# Altium PCB MADI_nRF52840_PCB_L4.PcbDoc (part 2 of 3)
Units mm, origin at the board's own origin, x right, y up, seen from the top; angles counter-clockwise.
Board outline 30 x 21.59 mm, 4 copper layers (L1, L2 (GND), L3 (GND), L4), stack 1.525 mm thick; 59 components, 58 nets, 307 pads, 195 vias.
Unrouted connection lines stored in the file: 114.
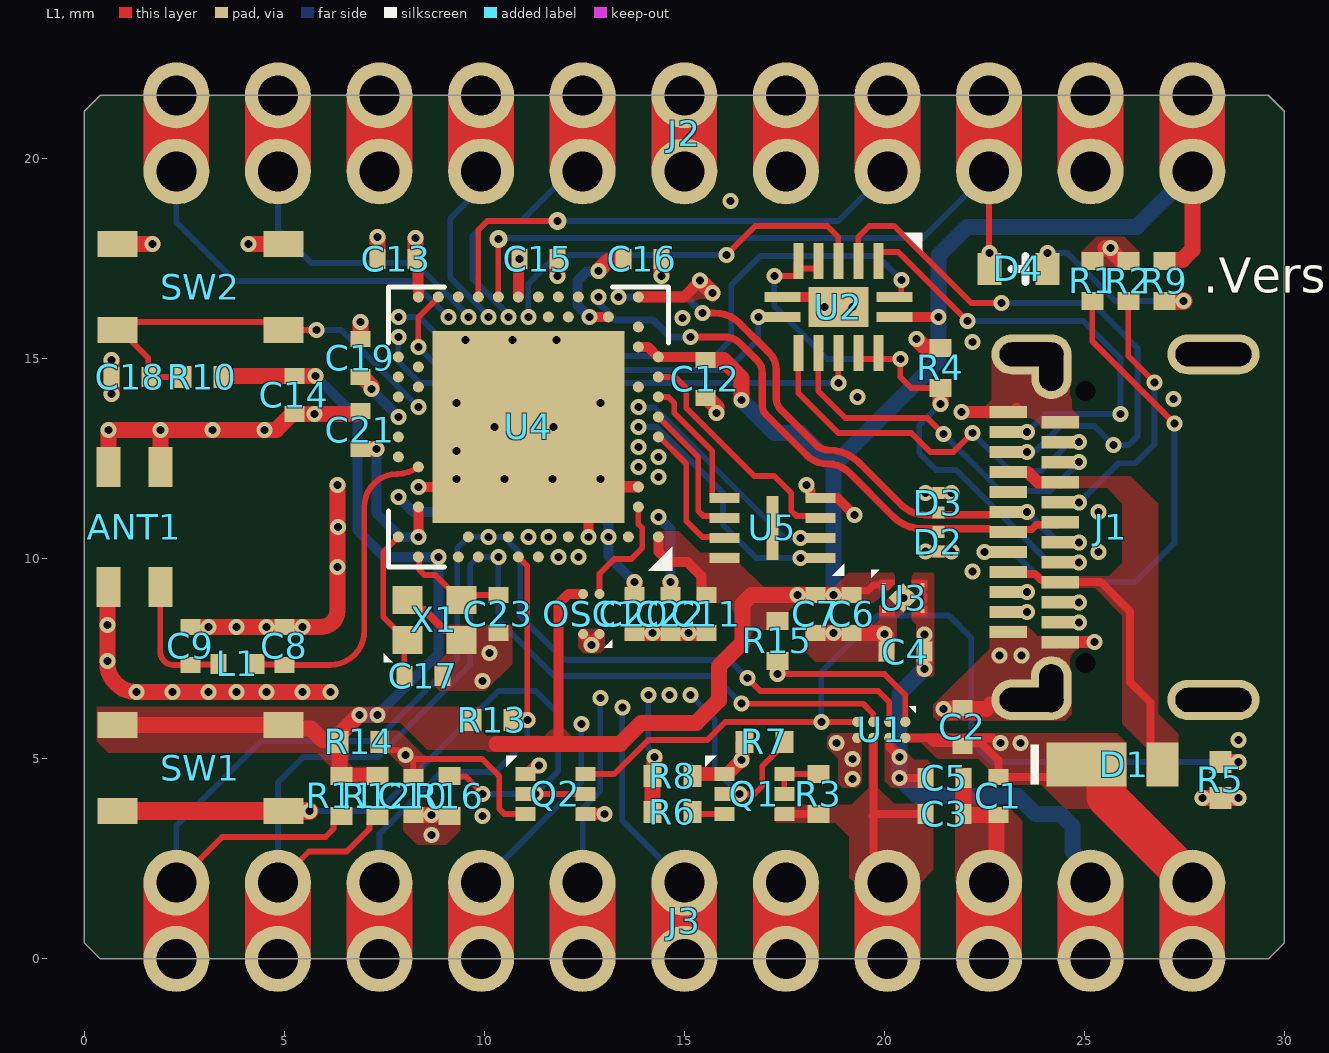
[diagram p0: L1 view]

## Part data (continued)
R6: library part RC0402FR-07360KL, "RES SMD 360K OHM 1% 1/16W 0402", Case Code (Imperial)=0402, Case Code (Metric)=1005, Manufacturer=Yageo, Max Operating Temperature=155°C, Max Power Dissipation=63mW, Min Operating Temperature=-55°C, Package Quantity=1, Power Rating=62.5mW, Resistance Tolerance=1%, Resistor Type="Thick Film", Supplier Part Number 1=311-360KLRCT-ND, Temperature Coefficient=100ppm/°C, Voltage Rating=50V, Case/Package=0402, Category="Chip SMD Resistors", ComponentLink1Description=https://datasheet.ciiva.com/2453/pyu-r-int-thick-7-2453620.pdf?src-supplier=Digi-Key, ComponentLink1URL=https://datasheet.ciiva.com/2453/pyu-r-int-thick-7-2453620.pdf?src-supplier=Digi-Key, ComponentLink2Description=https://datasheet.ciiva.com/2453/pyu-r-int-thick-7-2453621.pdf?src-supplier=Digi-Key, ComponentLink2URL=https://datasheet.ciiva.com/2453/pyu-r-int-thick-7-2453621.pdf?src-supplier=Digi-Key, ComponentLink3Description=https://datasheet.ciiva.com/2453/pyu-r-int-thick-7-2453619.pdf?src-supplier=Digi-Key, ComponentLink3URL=https://datasheet.ciiva.com/2453/pyu-r-int-thick-7-2453619.pdf?src-supplier=Digi-Key, ComponentLink4Description=https://datasheet.ciiva.com/12561/pyu-rc0402-51-rohs-l-6-r-8721-12561150.pdf?src-supplier=Mouser, ComponentLink4URL=https://datasheet.ciiva.com/12561/pyu-rc0402-51-rohs-l-6-r-8721-12561150.pdf?src-supplier=Mouser, ComponentLink5Description=https://datasheet.ciiva.com/8886/pyu-rc0402-51-rohs-l-6-8886029.pdf?src-supplier=Avnet, ComponentLink5URL=https://datasheet.ciiva.com/8886/pyu-rc0402-51-rohs-l-6-8886029.pdf?src-supplier=Avnet, ComponentLink6Description=https://datasheet.ciiva.com/16742/pyu-rc0402-51-rohs-l-6-r-16742217.pdf?src-supplier=Future+Electronics, ComponentLink6URL=https://datasheet.ciiva.com/16742/pyu-rc0402-51-rohs-l-6-r-16742217.pdf?src-supplier=Future+Electronics, Construction=Rectangular, Contact Plating=Tin,Matte, Depth=0.5mm, Features="Moisture Resistant", Height=0.016inch, Lead Free="Lead Free", Length=1mm, Manufacturer Part Number=RC0402FR-07360KL, Military Standard=Not, Number of Terminations=2, Packaging="Tape and Reel", Pricing 1="1=0.10000, 10=0.01400, 100=0.00580, 1000=0.00262, 2500=0.00228, 5000=0.00188 (USD)", RoHS=Yes, RoHS Compliant=Yes, Series=RC, Stock 1=662020, Supplier 1=Digi-Key, Termination=SMD/SMT, Tolerance=1%, Voltage Rating (DC)=50V, Width=0.02inch
R8: library part RC0402FR-0756KL, "RES SMD 56K OHM 1% 1/16W 0402", Case Code (Imperial)=0402, Case Code (Metric)=1005, Manufacturer=Yageo, Max Operating Temperature=155°C, Max Power Dissipation=63mW, Min Operating Temperature=-55°C, Package Quantity=1, Power Rating=62.5mW, Resistance=56kR, Resistance Tolerance=1%, Resistor Type="Thick Film", Supplier Part Number 1=311-56.0KLRCT-ND, Temperature Coefficient=100ppm/°C, Voltage Rating=50V, Case/Package=0402, Category="Chip SMD Resistors", ComponentLink1Description=https://datasheet.ciiva.com/46412/1018594-46412840.pdf?src-supplier=Element14, ComponentLink1URL=https://datasheet.ciiva.com/46412/1018594-46412840.pdf?src-supplier=Element14, ComponentLink2Description=https://datasheet.ciiva.com/2453/pyu-r-int-thick-7-2453479.pdf?src-supplier=Digi-Key, ComponentLink2URL=https://datasheet.ciiva.com/2453/pyu-r-int-thick-7-2453479.pdf?src-supplier=Digi-Key, ComponentLink3Description=https://datasheet.ciiva.com/2453/pyu-r-int-thick-7-2453480.pdf?src-supplier=Digi-Key, ComponentLink3URL=https://datasheet.ciiva.com/2453/pyu-r-int-thick-7-2453480.pdf?src-supplier=Digi-Key, ComponentLink4Description=https://datasheet.ciiva.com/2453/pyu-r-int-thick-7-2453478.pdf?src-supplier=Digi-Key, ComponentLink4URL=https://datasheet.ciiva.com/2453/pyu-r-int-thick-7-2453478.pdf?src-supplier=Digi-Key, ComponentLink5Description=https://datasheet.ciiva.com/5558/pyu-rc0402-51-rohs-l-6-r-5558279.pdf?src-supplier=Mouser, ComponentLink5URL=https://datasheet.ciiva.com/5558/pyu-rc0402-51-rohs-l-6-r-5558279.pdf?src-supplier=Mouser, ComponentLink6Description=https://datasheet.ciiva.com/7850/1018594-7850045.pdf?src-supplier=Element14, ComponentLink6URL=https://datasheet.ciiva.com/7850/1018594-7850045.pdf?src-supplier=Element14, ComponentLink7Description=https://datasheet.ciiva.com/7850/1018594-7850044.pdf?src-supplier=Element14, ComponentLink7URL=https://datasheet.ciiva.com/7850/1018594-7850044.pdf?src-supplier=Element14, Construction=Rectangular, Depth=0.5mm, Features="Moisture Resistant", Height=0.016inch, Lead Free="Lead Free", Length=1mm, Manufacturer Part Number=RC0402FR-0756KL, Military Standard=Not, Number of Terminations=2, Packaging="Tape and Reel", Pricing 1="1=0.10000, 10=0.01600, 100=0.00660, 1000=0.00299, 2500=0.00259, 5000=0.00214 (USD)", REACH SVHC="No SVHC", RoHS=Yes, RoHS Compliant=Yes, Series=RC, Stock 1=724545, Supplier 1=Digi-Key, Technology="THICK FILM", Termination=SMD/SMT, Tolerance=1%, Width=0.02inch, Working Voltage=50V
R9: library part RC0402FR-07510RL, "RES SMD 510 OHM 1% 1/16W 0402", Case Code (Imperial)=0402, Case Code (Metric)=1005, Manufacturer=Yageo, Max Operating Temperature=155°C, Max Power Dissipation=63mW, Min Operating Temperature=-55°C, Package Quantity=1, Supplier Part Number 1=311-510LRCT-ND, Temperature Coefficient=100ppm/°C, Tolerance=1%, Voltage Rating=50V, Case/Package=0402, Category 1=Resistors, Category 2="Chip Resistor - Surface Mount", ComponentLink1Description=https://datasheet.ciiva.com/17063/pyu-rc0402-51-rohs-l-6-r-17063430.pdf?src-supplier=Future+Electronics, ComponentLink1URL=https://datasheet.ciiva.com/17063/pyu-rc0402-51-rohs-l-6-r-17063430.pdf?src-supplier=Future+Electronics, ComponentLink2Description=https://datasheet.ciiva.com/2453/pyu-r-int-thick-7-2453397.pdf?src-supplier=Digi-Key, ComponentLink2URL=https://datasheet.ciiva.com/2453/pyu-r-int-thick-7-2453397.pdf?src-supplier=Digi-Key, ComponentLink3Description=https://datasheet.ciiva.com/2453/pyu-r-int-thick-7-2453398.pdf?src-supplier=Digi-Key, ComponentLink3URL=https://datasheet.ciiva.com/2453/pyu-r-int-thick-7-2453398.pdf?src-supplier=Digi-Key, ComponentLink4Description=https://datasheet.ciiva.com/2453/pyu-r-int-thick-7-2453399.pdf?src-supplier=Digi-Key, ComponentLink4URL=https://datasheet.ciiva.com/2453/pyu-r-int-thick-7-2453399.pdf?src-supplier=Digi-Key, Composition="Thick Film", Depth=0.5mm, Features="Moisture Resistant", Height=0.016inch, Lead Free="Lead Free", Length=1mm, Manufacturer 1=Yageo, Manufacturer Part Number=RC0402FR-07510RL, Manufacturer Part Number 1=RC0402FR-07510RL, Military Standard=Not, Mount="Surface Mount", Number of Terminations=2, Packaging="Tape and Reel", Power Rating=63mW, Pricing 1="1=0.10000, 10=0.01600, 100=0.00640, 1000=0.00289, 2500=0.00251, 5000=0.00207 (USD)", REACH SVHC=Unknown, Resistance=510R, RoHS=Yes, Stock 1=458379, Supplier 1=Digi-Key, Termination=SMD/SMT, Voltage Rating (DC)=50V, Weight=2.3E-05oz, Width=0.5mm
SW1 SW2: "SWITCH TACTILE SPST-NO 0.05A 16V", Contact Current(DC)-Max=50mA, Contact DC Max Rating R Load=.05A@16VDC, Contact Voltage(DC)-Max=16V, Manufacturer="Alps Electric", Max Operating Temperature=85°C, Min Operating Temperature=-30°C, Operating Force-Max=2.55N, Supplier Part Number 1=688-SKRPACE010, Actuator Type=STEM, Body Breadth=3.2inch, Body Height=1.6mm, Body Length or Diameter=4.2mm, Category="Tactile Switches", Circuit Configuration=1X1, ComponentLink1Description=https://datasheet.ciiva.com:443/pdfs/VipMasterIC/IC/ALPS/ALPS-S-A0002902398/ALPS-S-A0002902265-1.pdf?src-supplier=IHS+Markit, ComponentLink1URL=https://datasheet.ciiva.com:443/pdfs/VipMasterIC/IC/ALPS/ALPS-S-A0002902398/ALPS-S-A0002902265-1.pdf?src-supplier=IHS+Markit, ComponentLink2Description=https://datasheet.ciiva.com/16156/skrp-16156208.pdf?src-supplier=Onlinecomponents.com, ComponentLink2URL=https://datasheet.ciiva.com/16156/skrp-16156208.pdf?src-supplier=Onlinecomponents.com, ComponentLink3Description=https://datasheet.ciiva.com/18145/getdatasheetpartid-652528-18145947.pdf?src-supplier=Verical, ComponentLink3URL=https://datasheet.ciiva.com/18145/getdatasheetpartid-652528-18145947.pdf?src-supplier=Verical, Electrical Life=50000Cycles, JESD-609 Code=e4, Manufacturer Part Number=SKRPACE010, Mounting Technology="Surface Mount", Number of Switches=1, Packaging="Tape and Reel", Pricing 1="1=0.35000, 10=0.34500, 50=0.31500, 100=0.29500, 1000=0.29500, 10000=0.29400 (USD)", Reach SVHC Compliant=Yes, RoHS=Yes, RoHS Compliant=Yes, Stock 1=4937, Supplier 1=Mouser, Switch Action=MOMENTARY-TACTILE, Switch Function=SPST, Switch Type=Keypad, Terminal Finish=Silver, Termination=Solder
U1: "IC 1-A LI-ION IC PROGRAMMABLE CHARG", Manufacturer="Texas Instruments", Supplier Part Number 1=296-BQ25180YBGRCT-ND, ComponentLink1Description=https://www.ti.com/lit/ds/symlink/bq25180.pdf?ts=1664107697804&ref_url=https%253A%252F%252Fwww.ti.com%252Fproduct%252FBQ25180, ComponentLink1URL=https://www.ti.com/lit/ds/symlink/bq25180.pdf?ts=1664107697804&ref_url=https%253A%252F%252Fwww.ti.com%252Fproduct%252FBQ25180, Manufacturer Part Number=BQ25180YBGR, Pricing 1="1=2.78000, 10=2.50000, 25=2.35840, 100=2.00940, 250=1.88680, 500=1.65096, 1000=1.42400 (USD)", RoHS=No, Stock 1=5326, Supplier 1=Digi-Key
U2: "IC SWITCH QUAD SPST 14DHVQFN", Manufacturer=Nexperia, Supplier Part Number 1=1727-3499-1-ND, Category="Decoders and Multiplexers", ComponentLink1Description=https://assets.nexperia.com/documents/data-sheet/74LVC4066.pdf?src-supplier=Digi-Key, ComponentLink1URL=https://assets.nexperia.com/documents/data-sheet/74LVC4066.pdf?src-supplier=Digi-Key, Manufacturer Part Number=74LVC4066BQ,115, Pricing 1="1=0.67000, 10=0.59300, 25=0.55720, 100=0.45480, 250=0.42248, 500=0.35956, 1000=0.28764 (USD)", RoHS=Yes, RoHS Compliant=Yes, Stock 1=53790, Supplier 1=Digi-Key
U3: "IC REG LINEAR 3.3V 700MA 4XDFN", Manufacturer="ON Semiconductor", Supplier Part Number 1=NCP167BMX330TBGOSCT-ND, Category="Voltage Regulators - Linear", ComponentLink1Description=http://www.farnell.com/datasheets/2711391.pdf?src-supplier=Farnell, ComponentLink1URL=http://www.farnell.com/datasheets/2711391.pdf?src-supplier=Farnell, ComponentLink2Description=https://www.onsemi.com/pub/Collateral/NCP167-D.PDF?src-supplier=Digi-Key, ComponentLink2URL=https://www.onsemi.com/pub/Collateral/NCP167-D.PDF?src-supplier=Digi-Key, ComponentLink3Description=http://www.farnell.com/datasheets/2711391.pdf?src-supplier=Newark, ComponentLink3URL=http://www.farnell.com/datasheets/2711391.pdf?src-supplier=Newark, Manufacturer Part Number=NCP167BMX330TBG, Pricing 1="1=0.61000, 10=0.52500, 25=0.49000, 100=0.39210, 250=0.36408, 500=0.30806, 1000=0.23804 (USD)", RoHS=Yes, RoHS Compliant=Yes, Stock 1=222045, Supplier 1=Digi-Key
U4: library part NRF52840-QIAA-R7, "IC RF TXRX+MCU 802.15.4 73VFQFN", Manufacturer="Nordic Semiconductor", Supplier Part Number 1=1490-NRF52840-QIAA-R7CT-ND, Category="RF Receivers, Transceivers", Manufacturer Part Number=NRF52840-QIAA-R, Pricing 1="1=7.21000, 10=6.43500, 25=5.79160, 100=5.27670, 250=4.76192 (USD)", Pricing 2="1=0.44000, 10=0.36400, 50=0.32740, 100=0.29100, 500=0.27644, 1000=0.23280 (USD)", RoHS=Yes, RoHS Compliant=Yes, Stock 1=3157, Stock 2=16591, Supplier 1=Digi-Key, Supplier 2=Digi-Key, Supplier Part Number 2=490-18334-1-ND
U5: "IC FLASH 16MBIT SPI/QUAD 8USON", Frequency=33MHz, Manufacturer=Macronix, Max Operating Temperature=85°C, Min Operating Temperature=-40°C, Supplier Part Number 1=1092-1204-2-ND, Category=Memory, ComponentLink1Description=http://ckassoc.com/oldsite/pdf/Macronix_Product_Line_Card_July_2017_General%20_070617.pdf?src-supplier=Digi-Key, ComponentLink1URL=http://ckassoc.com/oldsite/pdf/Macronix_Product_Line_Card_July_2017_General%20_070617.pdf?src-supplier=Digi-Key, Lead Free="Lead Free", Manufacturer Part Number=MX25R1635FZUIL0, Memory Size=16Mb, Memory Type=Non-Volatile,FLASH, Mount="Surface Mount", Packaging="Tape and Reel", Pricing 1="12000=0.58880 (USD)", RoHS=Yes, RoHS Compliant=Yes, Stock 1=217224, Supplier 1=Digi-Key
X1: library part Q22FA1280002500, "CRYSTAL 32.0000MHZ 8PF SMD", Manufacturer=Seiko, Supplier Part Number 1=C187794, Manufacturer Part Number=Q22FA1280002500, Pricing 1="5=0.17610, 50=0.14280, 150=0.12660, 500=0.11100, 3000=0.10720, 6000=0.10480 (USD)", RoHS=No, Stock 1=25980, Supplier 1=LCSC

## Via types
v1: diameter 0.4, hole 0.2, L1 to L4, tented both sides, 193 vias
v2: diameter 0.45, hole 0.2, L1 to L4, tented both sides, 2 vias

## Nets (pads, with @x,y where several pads share a name; then routed paths per layer and width w, separated by ;. In a path a pad name is that pad's centre, name@x,y a point inside that pad or via, vN(x,y) a via of type N, cw(c..) or ccw(c..) an arc to the next point about the centre after c; other vN are vias at no path point)
+3V3: C6.2 C7.2 C11.2 C12.2 C13.2 C14.2 C15.2 J2.1 OSC1.3 R9.2 R10.2 R11.2 R12.2 R13.2 R14.2 R15.2 SW1.3 SW1.4 U2.14 U3.1 U4.A22 U4.AD14 U4.AD23 U4.B1 U4.W1 U4.Y2 U5.8 | length 81
  L1 w0.18: C6.2@19.175,9.1 19.285,9.21 19.596,9.21 19.736,9.35 U3.1@19.995,9.35
  L1 w0.25: 11.85,5.375 11.85,8.875 12.1,9.125 OSC1.3@12.47,9.125 ; U4.Y2@13.85,15.3 13.855,15.295 14.098,15.295 U4.W1@14.343,15.05 ; U4.B1@14.35,10.55 14.355,10.545 14.355,10.175 14.605,9.925 15.075,9.925 15.425,9.575 15.425,9.175 15.5,9.1 C11.2@15.55,9.1 ; U4.W1@14.35,15.05 15.45,15.05 C12.2@15.525,14.975 ; U2.14@20.25,16.05 v1(21.35,16.05)
  L1 w0.275: C13.2@8.337,17.438 8.337,16.837 8.35,16.825 U4.AD23@8.35,16.55 ; U4.AD14@10.85,16.55 10.85,17.475 v1(10.875,17.5)
  L1 w0.4: SW1.4@0.725,5.85 4.875,5.85 4.962,5.763 5.662,5.763 5.95,5.475 R14.2@6.35,5.475 ; R10.2@3.475,14.575 C14.2@5.25,14.575 v1(5.775,14.575) ; R14.2@6.375,5.425 6.4,5.45 6.4,5.625 v1(6.875,6.1) ; R14.2@6.375,5.475 6.375,4.601 6.4,4.576 R11.2@6.428,4.576 R12.2@7.325,4.575 ; C13.2@8.275,17.5 v1(8.275,18.025) ; 10.3,5.375 11.85,5.375 13.399,5.375 13.924,5.9 15.3,5.9 15.863,6.462 15.863,7.312 16.45,7.9 16.45,8.866 16.684,9.1 C7.2@18.275,9.1 v1(18.725,9.1) C6.2@19.175,9.1 ; C12.2@15.525,14.975 15.975,14.975 16.425,14.525 v1(16.425,13.975) ; R9.2@27,17.45 27.025,17.475 27.45,17.475 27.7,17.725 J2.1@27.7,19.685
  L2 (GND) w0.275: v1(5.775,14.575) 4.9,15.45 4.9,16.825 5.25,17.175 7.425,17.175 v1(8.275,18.025) 9.325,18.025 9.85,17.5 v1(10.875,17.5)
  L4 w0.25: v1(5.775,14.575) 6.825,13.525 6.825,10.725 7.5,10.05 v1(8.85,10.05) 8.85,7.625 v1(7.325,6.1) ; 20.575,14.2 20.6,14.2
  L4 w0.4: v1(6.875,6.1) v1(7.325,6.1) ; v1(16.425,13.975) 17.25,13.15 17.9,13.15 18.725,12.325 ; v1(17.825,9.1) v1(18.725,9.1) 18.725,12.325 ; J2.1@27.7,19.685 26.315,18.3 22.075,18.3 21.35,17.575 v1(21.35,16.05) 21.35,14.95 20.6,14.2 18.725,12.325
+VBAT: C3.2 J3.4 Q1.4 R3.2 U1.C2 | length 6
  L1 w0.2: Q1.4@17.5,3.625 R3.2@18.35,3.625 ; 19.7,3.575 19.725,3.6 ; U1.C2@19.725,5.525 19.725,3.6 ; J3.4@20.08,1.905 20.08,2.297 19.725,2.652 19.725,3.6 ; C3.2@21.025,3.625 19.75,3.625 19.725,3.6
+VBUS: D1.2 J1.A4 J1.A9 J1.B4 J1.B9 | length 9.4
  L1 w0.2: J1.A4@23.094,9.681 23.147,9.628 23.769,9.628 23.924,9.473 24.342,9.473 24.394,9.421 25.409,9.421 26.144,8.686 26.144,6.921 26.65,6.415 26.65,4.83 D1.2@26.944,4.536
  L1 w0.305: J1.A9@23.1,12.175 23.579,12.175 23.839,11.915 J1.B4@24.4,11.915
+VIN_5V0: C1.2 C2.2 D1.1 J3.1 U1.A2 U4.AD2 | length 29.4
  L1 w0.2: U1.A2@20.525,5.525 21.104,5.525 21.229,5.4 22.425,5.4 22.85,4.975 C1.2@22.85,4.55 24.825,4.55 D1.1@25.05,4.775
  L1 w0.23: 21.104,5.525 22.7,5.525
  L1 w0.275: U4.AD2@13.85,16.55 14.988,16.55 v1(15.394,16.956)
  L1 w0.4: v1(15.394,16.956) v1(15.7,16.65)
  L1 w1: D1.1@25.05,4.805 25.55,4.805 25.55,4.055 J3.1@27.7,1.905
  L3 (GND) w0.4: v1(15.394,16.956) v1(15.7,16.65) 16.957,16.65 18.1,15.507 18.1,13.95 20.288,11.762 20.288,10.062 22.1,8.25 22.1,5.8 22.5,5.4 v1(22.9,5.4) v1(23.4,5.4)
+VSYS: C4.2 C5.2 J3.2 U1.B2 U3.3 U3.4 | length 12.9
  L1 w0.1: U3.3@20.955,8.7 20.955,8.869 21.033,8.946 21.033,9.104 20.955,9.181 U3.4@20.955,9.35
  L1 w0.2: U1.B2@20.125,5.525 20.131,5.519 20.131,5.287 v1(20.375,5.043) ; 20.6,4.525 C5.2@21.025,4.525
  L1 w0.4: v1(21,7.25) v1(21,8.109)
  L4 w0.4: v1(21,8.109) v1(21,7.25) 20.375,6.625 v1(20.375,5.043) v1(20.375,4.525) 20.825,4.075 23.328,4.075 23.786,3.617 24.408,3.617 24.702,3.323 24.702,2.701 25.16,2.243 J3.2@25.16,1.905
GND: ANT1.2 ANT1.3 ANT1.4 C1.1 C2.1 C3.1 C4.1 C5.1 C6.1 C7.1 C8.1 C9.1 C10.1 C11.1 C12.1 C13.1 C14.1 C15.1 C16.1 C17.2 C18.1 C19.1 C20.1 C21.1 C22.1 C23.2 D2.2 D3.2 J1.A1 J1.A12 J1.B1 J1.B12 J1.S1 J1.S2 J1.S3 J1.S4 J2.2 J2.9 J3.3 J3.5 OSC1.1 OSC1.4 Q1.1 Q2.1 Q2.4 R1.1 R2.1 R4.1 R5.1 R7.1 R8.1 R16.1 SW2.3 SW2.4 U1.D2 U2.7 U2.15 U3.2 U3.5 U4.B7 U4.EXP U4.F2 U4.F23 U5.4 X1.2 X1.4 | length 61.3
  L1 w0.2: X1.4@8.075,8.975 8.325,8.725 8.5,8.725 9,8.225 9.175,8.225 X1.2@9.425,7.975 ; U4.EXP@9.6,11.8 10.25,12.45 v1(10.25,13.3) 10.95,13.3 11.025,13.375 U4.EXP@11.1,13.3
  L1 w0.25: v1(8.35,11.8) U4.EXP@9.6,11.8 ; U4.EXP@11.1,13.3 12.6,11.8 v1(12.6,10.55) ; OSC1.4@12.47,8.125 12.47,8.096 12.675,7.891 v1(12.675,7.85) ; v1@12.694,7.939 OSC1.1@12.88,8.125 ; U2.7@17.45,16.55 18.6,16.55 U2.15@18.85,16.3 ; v1(18.05,11.85) 18.05,11.809 18.15,11.709 18.15,11.527 18.152,11.525 U5.4@18.4,11.525 U5.4@18.4,11.525 18.827,11.523 v1(19.25,11.1)
  L1 w0.285: U4.EXP@12.6,11.8 U4.F2@13.85,11.8
  L1 w0.3: Q2.1@11.025,4.625 11.1,4.625 11.293,4.818 11.343,4.818 v1(11.362,4.837) ; Q2.4@12.525,3.625 v1(13,3.625) ; v1(21.025,10.185) v1(21.675,10.185) ; v1(21.025,11.65) v1(21.675,11.65) ; v1(21.925,13.675) J1.A12@23.1,13.675 ; J1.A12@23.3,13.75 J1.A12@23.302,13.748 ; J1.B12@24.4,7.915 24.402,7.917 25.242,7.917 v1(25.25,7.925)
  L1 w0.35: R8.1@15.2,4.575 15.25,4.625 16.075,4.625 v1(16.425,4.975) 16.425,4.989 16.45,5.014 16.45,5.375 R7.1@16.5,5.425
  L1 w0.4: ANT1.4@0.6,9.295 0.575,9.27 v1(0.575,8.35) v1(0.575,7.45) 0.575,7.4 ccw(c1.3,7.4) v1(1.3,6.675) v1(2.2,6.675) v1(3.1,6.675) v1(3.8,6.675) v1(4.55,6.675) v1(6.15,6.675) ; ANT1.3@0.6,12.295 v1(0.6,13.225) v1(1.9,13.225) ; v1(0.675,14.125) v1(0.675,14.975) ; SW2.4@0.825,17.875 v1(1.7,17.875) ; ANT1.2@1.9,12.295 v1(1.9,13.225) ; C9.1@2.65,8.3 v1(3.1,8.3) v1(3.8,8.3) v1(4.55,8.3) C8.1@5,8.3 5.925,8.3 ccw(c5.925,8.7) 6.325,8.7 v1(6.325,9.8) ; v1(4.1,17.875) SW2.3@4.975,17.875 ; v1@6.325,9.86 6.325,10.793 v1(6.325,11.85) ; C21.1@6.9,13.7 6.85,13.7 6.775,13.625 C14.1@5.25,13.625 5.2,13.625 4.8,13.225 v1(4.5,13.225) v1(3.2,13.225) v1(1.9,13.225) ; C19.1@6.9,15.5 v1(6.9,15.925) ; C13.1@7.325,17.5 v1(7.325,18.05) ; C10.1@8.225,3.6 v1(8.675,3.6) 9.1,3.6 R16.1@9.125,3.575 ; v1(11.825,17.075) C15.1@11.825,17.5 ; C20.1@13.75,8.15 v1(14.2,8.15) C22.1@14.65,8.15 v1(15.1,8.15) C11.1@15.55,8.15 ; v1@14.425,17.125 C16.1@14.425,17.5 ; C12.1@15.575,14.025 15.8,13.8 v1(15.8,13.65) ; C7.1@18.275,8.15 v1(18.725,8.15) C6.1@19.175,8.15 19.961,8.15 19.986,8.125 v1(20,8.125) 20.05,8.075 C4.1@20.05,7.68 ; v1(20.8,15.5) 21,15.3 21.375,15.3 R4.1@21.4,15.275 ; v1(21.475,6.25) 22.547,6.25 22.656,6.359 23.318,6.359 J1.S3@23.681,6.722 ; C3.1@21.975,3.6 C1.1@22.8,3.6 ; C3.1@21.975,3.625 C5.1@21.975,4.525 ; J3.3@22.62,1.905 22.8,2.085 C1.1@22.8,3.6 ; C1.1@22.85,3.6 C1.1@22.8,3.6 ; v1@25.525,17.775 25.535,17.765 25.61,17.765 25.925,17.45 R2.1@25.975,17.45 ; v1(27.95,4.025) R5.1@28.4,4.025 v1(28.85,4.025)
  other v1: 8.675,3.1 9.95,3.575 19.2,4.5 19.2,5 18.8,5.4 28.85,5.475 14.625,6.6 5.45,6.675 9.95,6.95 22.881,7.59 23.431,7.59 10.125,7.65 5.45,8.3 20.475,9.025 22.2,9.68 25.35,10.175 6.337,10.793 25.35,11.175 9.3,12 10.5,12 11.7,12 12.9,12 9.3,12.7 11.725,13.3 5.75,13.625 9.3,13.9 12.9,13.9 27.225,14 19.325,14.05 22.2,15.425 9.525,15.475 10.7,15.475 11.8,15.475 14.95,16.025 18.5,16.3 19.2,16.3 14.425,17.075 25.65,17.775 16.15,18.95